# Altium PCB hexbot_bluetooth.PcbDoc
Units mm, origin at the board's own origin, x right, y up, seen from the top; angles counter-clockwise.
Board outline 79.95 x 69.34 mm, 2 copper layers (Top Layer, Bottom Layer); 32 components, 16 nets, 110 pads, 7 vias.
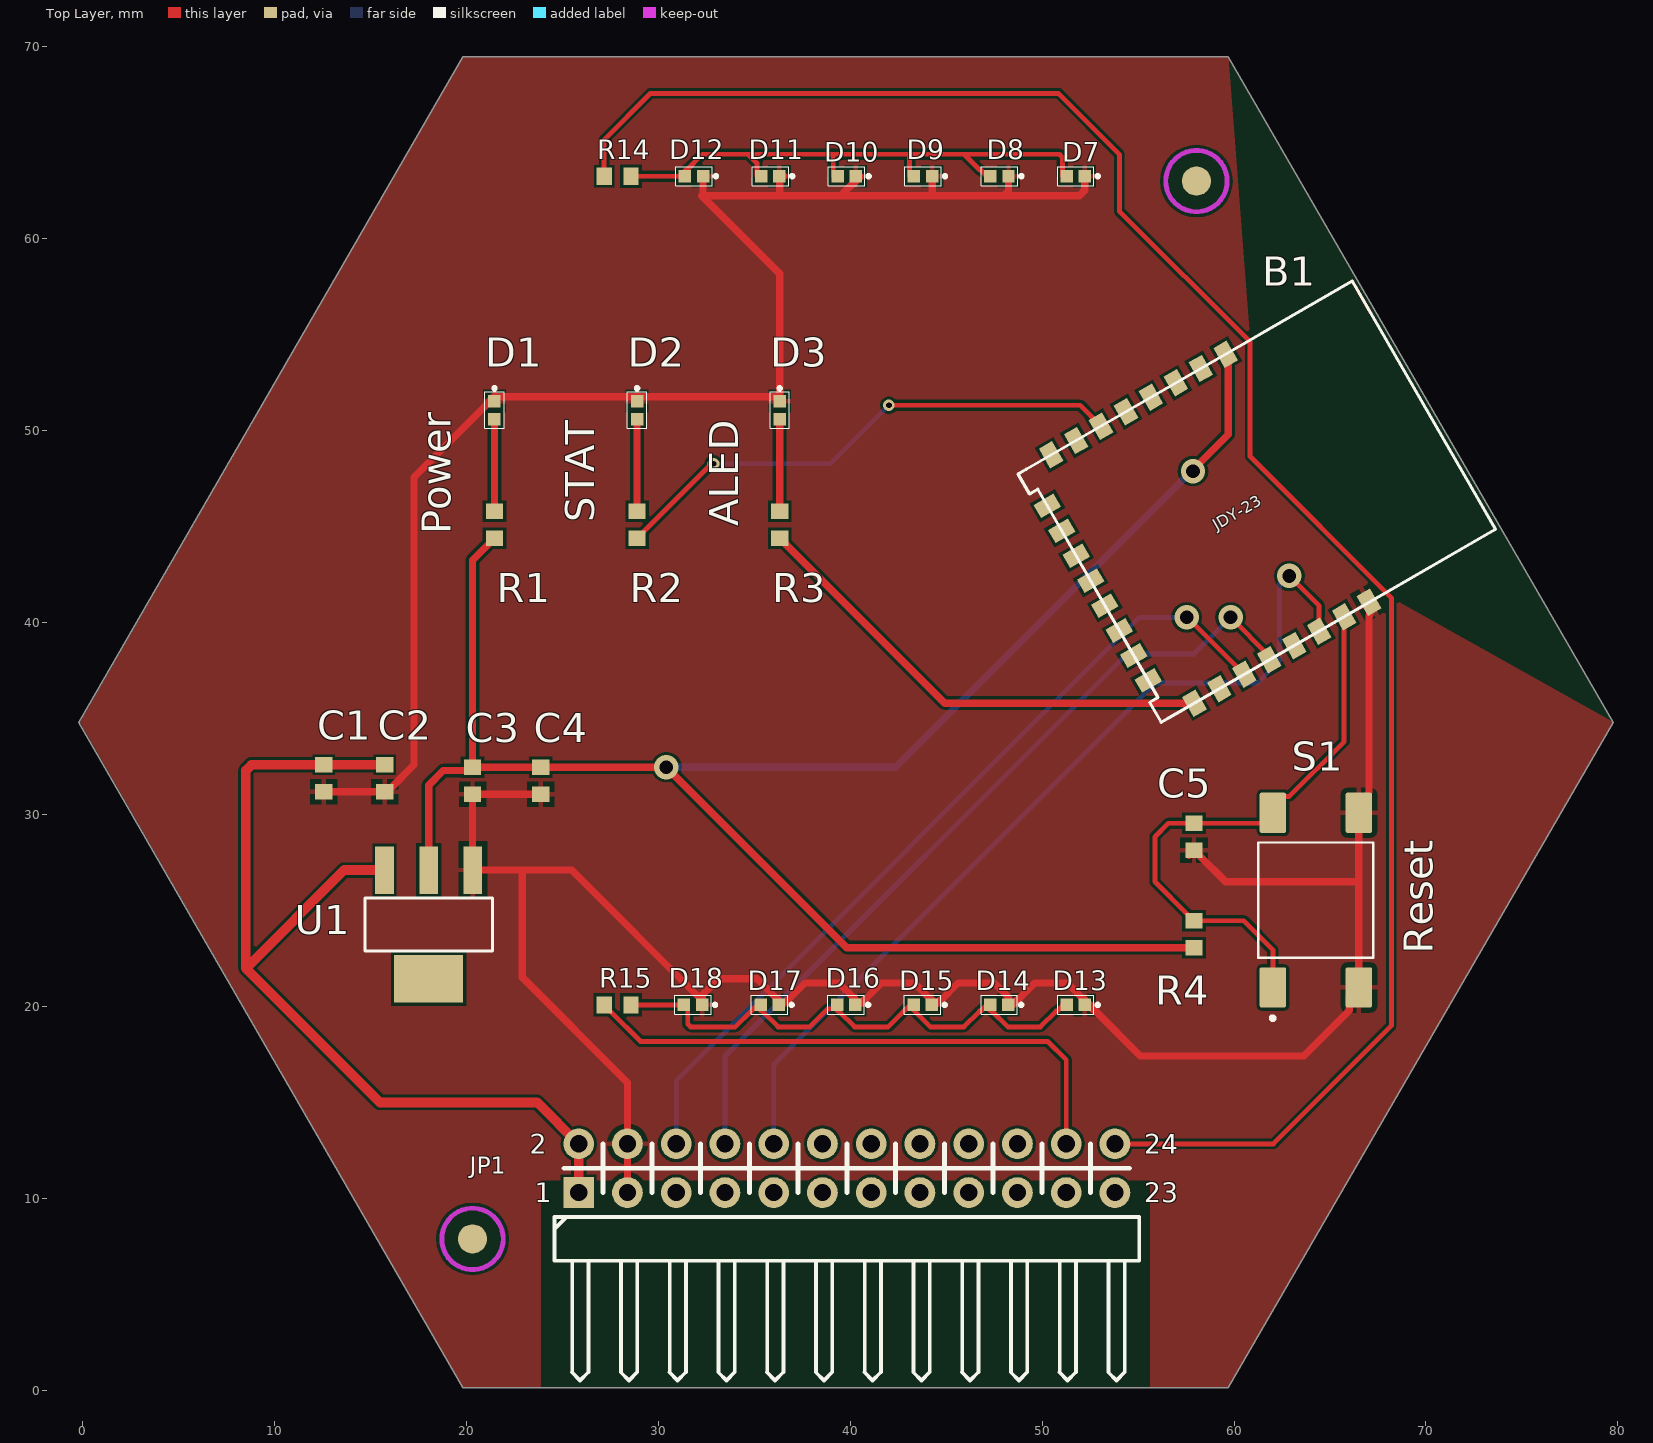
[diagram p0: Top Layer view]
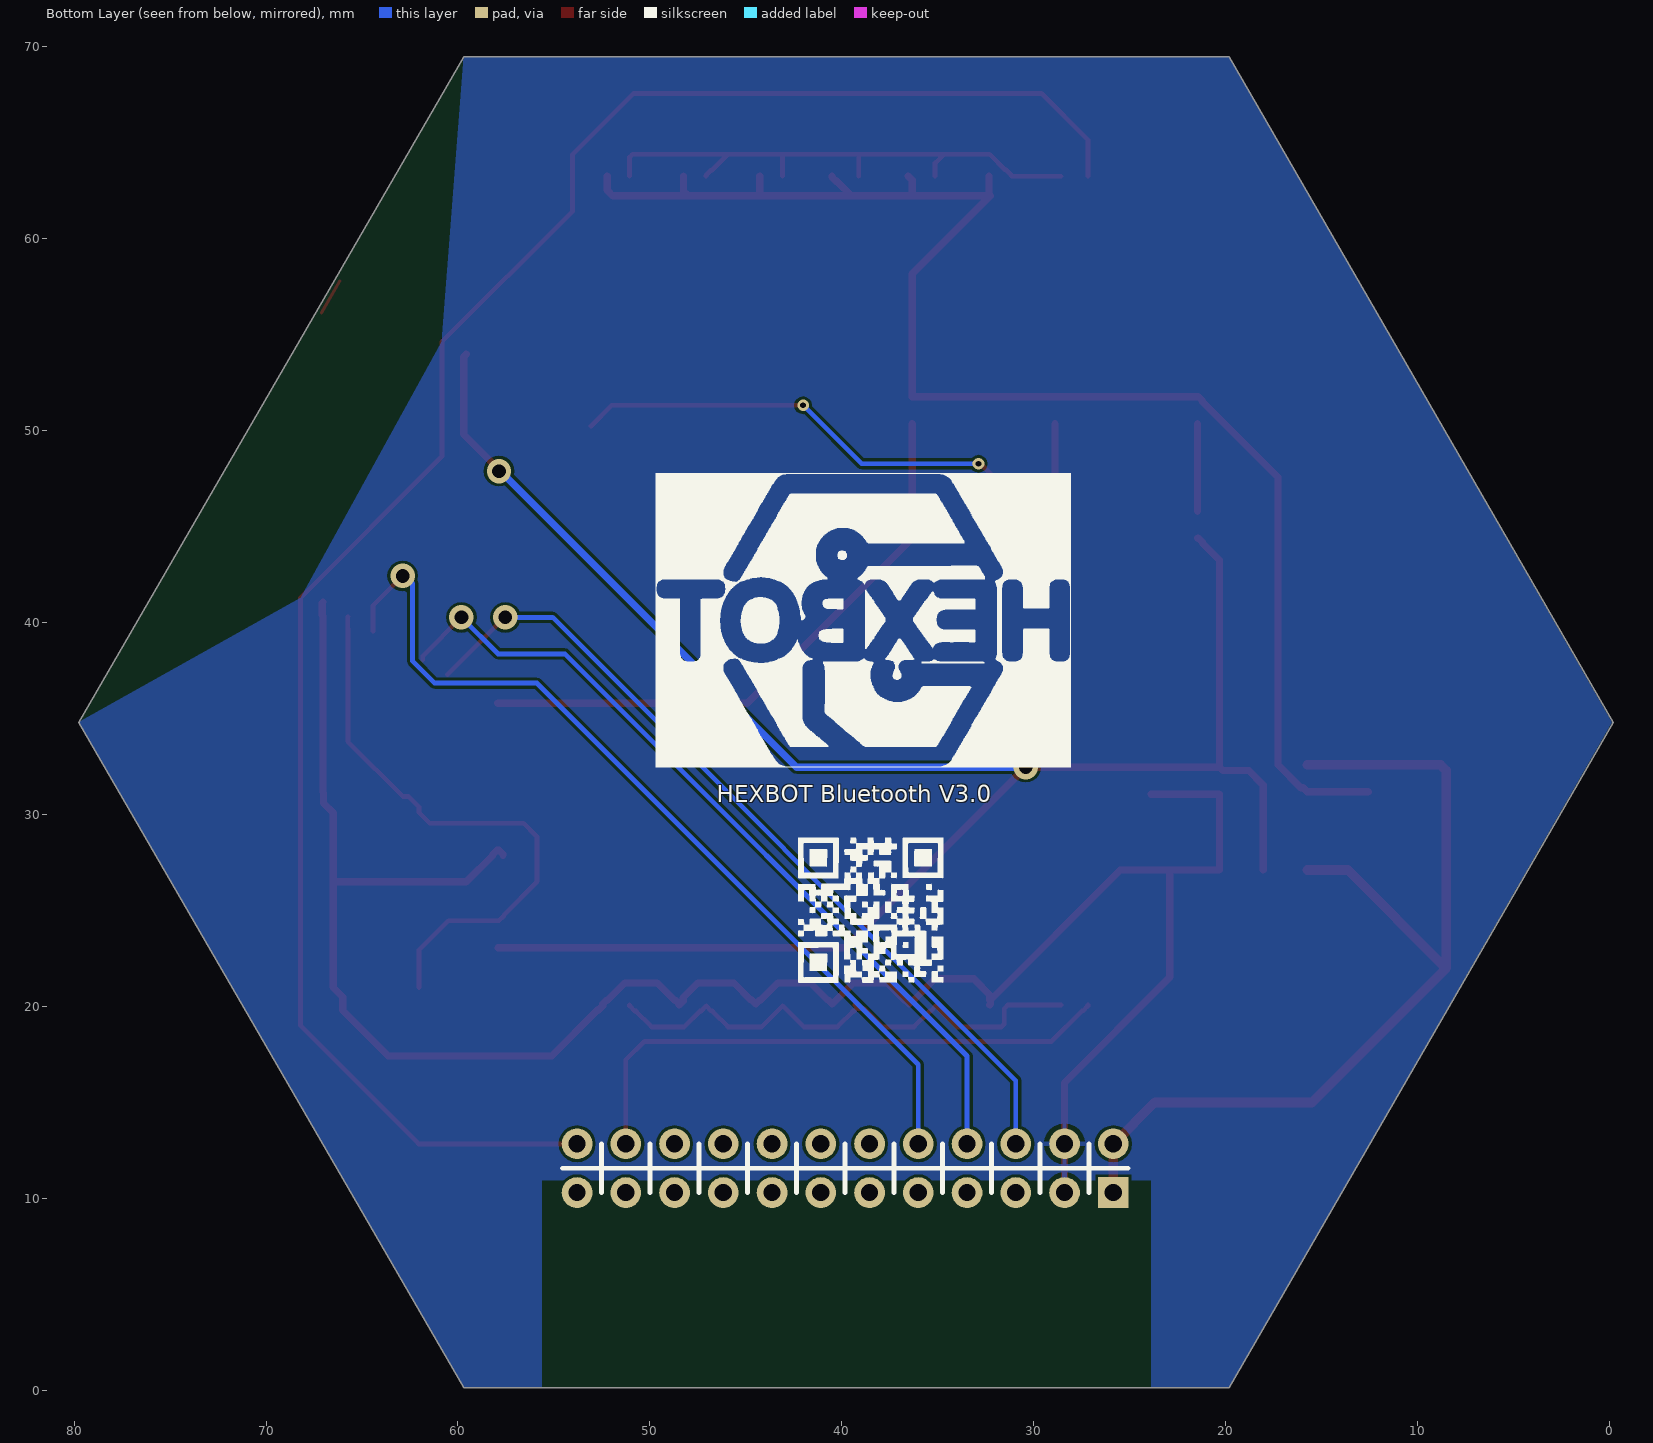
[diagram p1: Bottom Layer view, seen from below]

## Layer stack, top to bottom
Top Solder: solder mask 0.0102, Solder Resist, Dk 3.5
Top Layer: signal copper 0.0356
Dielectric 1: dielectric 0.32, FR-4, Dk 4.8
Bottom Layer: signal copper 0.0356
Bottom Solder: solder mask 0.0102, Solder Resist, Dk 3.5

## Board outline
19.812,0.127 -0.198,34.788 19.812,69.469 59.69,69.469 79.756,34.788 59.69,0.127

## Design rules (kind name [scope] priority, off if disabled: settings)
Clearance [All] p1: gap=0.152 ignorepadtopadclearanceinfootprint=TRUE
HoleToHoleClearance [All] p1: gap=0 allowstackedmicrovias=TRUE
MinimumSolderMaskSliver [All] p1: minsoldermaskwidth=0
PolygonConnect [All] p1: connectstyle=Relief reliefconductorwidth=0.254 reliefentries=4 polygonreliefangle="90 Angle" airgapwidth=0.254
RoutingVias [All] p1: holewidth=0.711 width=1.27 viastyle="Through Hole" minholewidth=0.254 minwidth=0.508 maxholewidth=0.711 maxwidth=1.27
SilkToSilkClearance [All] p1: silktosilkclearance=0
SilkToSolderMaskClearance [IsPad] p1: minsilkscreentomaskgap=0 clearancetoexposedcopper=TRUE
SolderMaskExpansion [All] p1: expansion=0.102 istentingtop=FALSE
Width Width_1 [OnLayer('Top Overlay')] p1: maxlimit=5 minlimit=0.01 preferedwidth=0.254
Width 电源 [InNetClass('电源')] p2: maxlimit=0.508 minlimit=0.381 preferedwidth=0.381
Width [InNetClass('All Nets')] p3: maxlimit=0.508 minlimit=0.254 preferedwidth=0.254
26 further rules are at their usual default settings.

## Classes and differential pairs
component class hexbot_bluetooth: B1 C1 C2 C3 C4 C5 D1 D2 D3 D7 D8 D9 D10 D11 D12 D13 D14 D15 D16 D17 D18 JP1 R1 R2 R3 R4 R14 R15 S1 U1

## Components (designator, comment, footprint, x,y, rotation, side; value= is the part's Value field where it differs from the comment)
B1 "JDY-23" BlueTooth_JDY-23 60.479,45.908 r30 top
C1 "10uF" 1608[0603] 12.573,31.877 r90 top
C2 "0.1uF" 1608[0603] 15.748,31.877 r90 top
C3 "10uF" 1608[0603] 20.32,31.75 r90 top
C4 "0.1uF" 1608[0603] 23.876,31.75 r90 top
C5 "Cap Semi" 1608[0603] 57.912,28.829 r90 top value=10u
D1 "LED2" DIOC1005X06N 21.463,51.054 r90 top
D2 "LED2" DIOC1005X06N 28.892,51.054 r90 top
D3 "LED2" DIOC1005X06N 36.322,51.054 r90 top
D7 "LED2" DIOC1005X06N 51.751,63.246 r0 top
D8 "LED2" DIOC1005X06N 47.772,63.246 r0 top
D9 "LED2" DIOC1005X06N 43.792,63.246 r0 top
D10 "LED2" DIOC1005X06N 39.813,63.246 r0 top
D11 "LED2" DIOC1005X06N 35.834,63.246 r0 top
D12 "LED2" DIOC1005X06N 31.854,63.246 r0 top
D13 "LED2" DIOC1005X06N 51.751,20.066 r0 top
D14 "LED2" DIOC1005X06N 47.763,20.066 r0 top
D15 "LED2" DIOC1005X06N 43.775,20.066 r0 top
D16 "LED2" DIOC1005X06N 39.788,20.066 r0 top
D17 "LED2" DIOC1005X06N 35.8,20.066 r0 top
D18 "LED2" DIOC1005X06N 31.812,20.066 r0 top
JP1 "Header 2X11" HDR2.54-WI-2x12P 39.822,11.557 r0 top
mark1 "Mark" Mark 20.32,7.874 r90 top
mark2 "Mark" Mark 58.039,62.992 r90 top
R1 "1K" 1608[0603] 21.463,45.085 r270 top
R2 "1K" 1608[0603] 28.892,45.085 r270 top
R3 "1K" 1608[0603] 36.322,45.085 r270 top
R4 "Res1" 1608[0603] 57.912,23.749 r270 top value=10K
R14 "51R" 1608[0603] 27.875,63.246 r180 top
R15 "51R" 1608[0603] 27.875,20.066 r180 top
S1 "4-1437565-1" TE_FSM4JSMA 64.262,25.527 r90 top
U1 "AMS1117-3.3" SOT-223-4_L6.5-W3.5-P2.30-LS7.0-BR 18.034,24.257 r90 top

## Footprints (in the part's own frame and the unit in brackets; to place one, negate y for a bottom-side part, rotate by r counter-clockwise, add the part's x,y. Pads: shape width x height; smd on the part's side, far side on the other; paste and mask are expansions set on the pad)
1608[0603] [mm] "Chip Capacitor, Body 1.6x0.8mm, IPC High Density"
  rect 0.8x0.9 smd: 1(-0.7,0) 2(0.7,0)
  body extent -0.87,-0.48 0.87,0.48, height 1.3
BlueTooth_JDY-23 [mm]
  rect 0.8x1.2 smd: 1(3.24,7.444) 2(1.74,7.444) 3(0.24,7.444) 4(-1.26,7.444) 5(-2.76,7.444) 6(-4.26,7.444) 7(-5.76,7.444) 8(-7.26,7.444) 17(-7.26,-7.491) 18(-5.76,-7.491) 19(-4.26,-7.491) 20(-2.76,-7.491) 21(-1.26,-7.491) 22(0.24,-7.491) 23(1.74,-7.491) 24(3.24,-7.491)
  rect 1.2x0.8 smd: 9(-8.76,5.242) 10(-8.76,3.742) 11(-8.76,2.242) 12(-8.76,0.742) 13(-8.76,-0.758) 14(-8.76,-2.258) 15(-8.76,-3.758) 16(-8.76,-5.258)
  Top Layer lines w0.16: 10.855,7.444 10.855,5.539
  silkscreen extent -9.26,-7.49 10.85,7.44
DIOC1005X06N [mm] "Chip Diode, 2-Leads, Body 1.00x0.50mm, IPC Medium Density"
  rect 0.65x0.65 smd: 1(-0.475,0) 2(0.475,0)
  silkscreen extent -0.95,-0.5 1.18,0.5
HDR2.54-WI-2x12P [mm] "双排弯脚排针，12x2脚  淘宝ID:黄晶宝石   店铺网址:https://shop463601444.taobao.com"
  rect 1.6x1.6 hole 0.9: 1(-13.97,-1.27)
  round 1.6 hole 0.9: 2(-13.97,1.27) 3(-11.43,-1.27) 4(-11.43,1.27) 5(-8.89,-1.27) 6(-8.89,1.27) 7(-6.35,-1.27) 8(-6.35,1.27) 9(-3.81,-1.27) 10(-3.81,1.27) 11(-1.27,-1.27) 12(-1.27,1.27) 13(1.27,-1.27) 14(1.27,1.27) 15(3.81,-1.27) 16(3.81,1.27) 17(6.35,-1.27) 18(6.35,1.27) 19(8.89,-1.27) 20(8.89,1.27) 21(11.43,-1.27) 22(11.43,1.27) 23(13.97,-1.27) 24(13.97,1.27)
  silkscreen extent -15.24,-11.06 15.24,1.27, body extent -15.24,-11.23 15.24,1.62, height 5.1
Mark [mil]
  round 60 smd mask+39.37: mark(0,0)
  Top Layer keep-out circle w10: c0,0 r62.99
SOT-223-4_L6.5-W3.5-P2.30-LS7.0-BR [mm]
  rect 2.47x0.98 smd: 1(2.835,-2.3) 2(2.835,0) 3(2.835,2.3)
  rect 2.47x3.6 smd: 4(-2.835,0)
  silkscreen extent -1.37,-3.33 1.37,3.33
TE_FSM4JSMA [mm]
  rrect15% 2.1x1.38 smd: 1(-4.55,2.24) 2(4.55,2.24) 3(-4.55,-2.24) 4(4.55,-2.24)
  silkscreen extent -6.25,-3 3,3

## Part data
B1: library part BlueTooth
C1 C2 C3 C4: library part "Cap Semi", "Capacitor (Semiconductor SIM Model)", LatestRevisionDate=29-May-2009, LatestRevisionNote="IPC-7351 Footprint Added.", PackageDescription="Chip Capacitor", PackageReference=C1206, Published=8-Jun-2000, Publisher="Altium Limited"
C5: "Capacitor (Semiconductor SIM Model)", LatestRevisionDate=29-May-2009, LatestRevisionNote="IPC-7351 Footprint Added.", PackageDescription="Chip Capacitor", PackageReference=C1206, Published=8-Jun-2000, Publisher="Altium Limited"
D1 D2 D3 D7 D8 D9 D10 D11 D12 D13 D14 D15 D16 D17 D18: "Typical RED, GREEN, YELLOW, AMBER GaAs LED", LatestRevisionDate=17-Jul-2002, LatestRevisionNote="Re-released for DXP Platform.", PackageDescription="SM LED; 2 Flat Leads", PackageReference=3.2X1.6X1.1, PackageVersion=Feb-2002, Published=8-Jun-2000, Publisher="Altium Limited"
JP1: library part "Header 12X2", "12*2P接插件", BOM名称=12*2P接插件, 学习资源=https://shop463601444.taobao.com, 版权归属="封装库来自淘宝卖家 ID：黄晶宝石"
R1 R2 R3: library part Res3, "Resistor", LatestRevisionDate=29-May-2009, LatestRevisionNote="IPC-7351 Footprint Added.", PackageDescription="Chip Resistor", PackageReference=J1-0603, Published=8-Jun-2000, Publisher="Altium Limited"
R4: "Resistor", LatestRevisionDate=17-Jul-2002, LatestRevisionNote="Re-released for DXP Platform.", PackageDescription="Axial Device, Thru-Hole; 2 Leads; 0.3 in Pin Spacing", PackageReference=AXIAL-0.3, Published=8-Jun-2000, Publisher="Altium Limited"
R14 R15: library part Res1, "Resistor", LatestRevisionDate=17-Jul-2002, LatestRevisionNote="Re-released for DXP Platform.", PackageDescription="Axial Device, Thru-Hole; 2 Leads; 0.3 in Pin Spacing", PackageReference=AXIAL-0.3, Published=8-Jun-2000, Publisher="Altium Limited"
S1: library part FSM4JSMA, "Tactile Switch SPST-NO Top Actuated Surface Mount", Contact_Current_Rating="50 mA", Package=None, Availability=Unavailable, Configuration_Pole-Throw="Single Pole - Single Throw", EU_RoHS_Compliance=Compliant, MF="TE Connectivity", MP=FSM4JSMA, Price=None, SnapEDA_Link=https://www.snapeda.com/parts/FSM4JSMA/TE%20Connectivity%20ALCOSWITCH%20Switches/view-part/543632/?ref=snap, TE_purchase_URL=https://www.te.com/usa-en/product-4-1437565-1.html?te_bu=Cor&te_type=disp&te_campaign=seda_glo_cor-seda-global-disp-prtnr-fy19-seda-model-bom-cta_sma-317_1&elqCampaignId=32493
U1: "Sot223/Pkg 1-Amp 3.3-Volt Low Drop Out Voltage Regulatator", Package=None, Availability=Unavailable, MF="Advanced Monolithic Systems", MP=AMS1117-3.3, Price=None, SnapEDA_Link=https://www.snapeda.com/parts/AMS1117-3.3/Advanced%20Monolithic%20Systems/view-part/53450/?ref=snap

## Via types
v1: diameter 1.27, hole 0.711, Top Layer to Bottom Layer, tented both sides, 5 vias
v2: diameter 0.6, hole 0.3, Top Layer to Bottom Layer, 2 vias

## Nets (pads, with @x,y where several pads share a name; then routed paths per layer and width w, separated by ;. In a path a pad name is that pad's centre, name@x,y a point inside that pad or via, vN(x,y) a via of type N, cw(c..) or ccw(c..) an arc to the next point about the centre after c; other vN are vias at no path point)
+5: C1.2 C2.2 JP1.1 JP1.2 U1.3 | length 50.7
  Top Layer w0.508: U1.3 13.63,27.092 8.509,21.971 ; C2.2 C1.2 8.807,32.577 8.509,32.279 8.509,21.971 ; JP1.1 JP1.2 23.693,14.986 15.494,14.986 8.509,21.971
ALED: B1.17 R3.2 | length 25.2
  Top Layer w0.381: R3.2 36.372,44.385 36.582,44.175 36.582,44.125 44.916,35.791 B1.17
GND: B1.24 C1.1 C2.1 C3.1 C4.1 C5.1 D1.2 D2.2 D3.2 D7.2 D8.2 D9.2 D10.2 D11.2 D12.2 D13.2 D14.2 D15.2 D16.2 D17.2 D18.2 JP1.3 JP1.4 S1.3 S1.4 U1.1 | length 199.4
  Top Layer w0.381: C1.1 C2.1 15.958,31.387 16.082,31.387 17.272,32.577 17.272,47.563 21.203,51.495 21.203,51.545 21.413,51.754 36.322,51.754 36.322,58.166 ; C4.1 C3.1 20.32,27.106 U1.1 22.91,27.092 ; JP1.3 JP1.4 28.392,16.017 22.91,21.499 22.91,27.092 ; D18.2 32.253,20.1 32.253,20.326 25.486,27.092 22.91,27.092 ; D18.2@32.287,20.326 32.287,20.586 33.123,21.422 35.144,21.422 36.24,20.326 36.29,20.326 36.5,20.116 36.709,20.326 36.759,20.326 37.643,21.209 39.395,21.209 40.488,20.116 40.697,20.326 40.747,20.326 41.631,21.209 43.338,21.209 43.561,20.986 43.561,20.98 44.216,20.326 44.266,20.326 44.475,20.116 44.685,20.326 44.735,20.326 45.618,21.209 47.498,21.209 48.254,20.453 48.254,20.276 48.463,20.066 48.463,20.116 48.673,20.326 48.723,20.326 49.606,21.209 51.308,21.209 52.192,20.326 52.242,20.326 52.451,20.116 52.451,20.016 52.661,19.806 52.711,19.806 55.118,17.399 63.627,17.399 66.003,19.775 66.003,20.477 S1.3 66.502,26.481 ; D12.2 32.329,62.159 36.322,58.166 ; 36.322,62.23 36.324,62.232 36.324,63.036 D11.2@36.534,63.246 ; D10.2@40.513,63.246 40.513,63.196 40.304,62.986 40.254,62.986 39.497,62.23 ; 44.196,62.23 44.267,62.301 D9.2 ; D8.2 48.247,62.471 48.006,62.23 ; D7.2 52.226,62.513 51.943,62.23 48.006,62.23 ; C5.1@57.652,27.87 57.652,27.92 57.862,28.129 C5.1 57.962,28.129 58.172,27.92 58.172,27.87 59.56,26.481 66.502,26.481 ; B1.24 67.063,41.008 67.063,40.377 67.031,40.344 67.031,31.16 67.002,31.131 67.002,30.577 S1.4 66.502,26.481 ; 36.322,58.166 32.258,62.23 39.497,62.23 ; 39.497,62.23 48.006,62.23
LED1: JP1.24 R14.2 | length 99.6
  Top Layer w0.254: R14.2 27.175,65.148 29.591,67.564 50.847,67.564 54.022,64.389 54.022,61.421 60.833,54.61 60.833,48.639 68.199,41.273 68.199,18.981 62.045,12.827 JP1.24@53.485,12.827
LED2: JP1.22 R15.2 | length 29.4
  Top Layer w0.254: R15.2 27.175,20.016 27.448,19.743 27.498,19.743 29.08,18.161 50.292,18.161 51.252,17.201 JP1.22@51.252,13.049
NetD1_1: D1.1 R1.1 | length 4.6
  Top Layer w0.381: R1.1 D1.1@21.463,50.354
NetD2_1: D2.1 R2.1 | length 4.6
  Top Layer w0.381: R2.1 D2.1@28.892,50.354
NetD3_1: D3.1 R3.1 | length 4.6
  Top Layer w0.381: R3.1 D3.1@36.322,50.354
NetD7_1: D7.1 D8.1 D9.1 D10.1 D11.1 D12.1 R14.1 | length 29.3
  Top Layer w0.254: R14.1 31.154,63.246 31.154,63.296 31.427,63.569 31.477,63.569 32.297,64.389 34.671,64.389 ; D11.1@35.134,63.246 35.134,63.926 34.671,64.389 ; D10.1@39.113,63.246 39.113,64.389 ; 43.053,64.389 43.092,64.35 D9.1@43.092,63.246 ; D8.1@47.072,63.246 47.072,63.296 46.799,63.569 46.749,63.569 45.929,64.389 ; D7.1@51.051,63.246 51.051,64.24 50.902,64.389 45.929,64.389 ; 34.671,64.389 39.113,64.389 ; 39.113,64.389 43.092,64.389 45.929,64.389
NetD13_1: D13.1 D14.1 D15.1 D16.1 D17.1 D18.1 R15.1 | length 27.7
  Top Layer w0.254: R15.1 D18.1 31.535,19.868 31.535,19.072 31.684,18.923 34.007,18.923 34.827,19.743 35.1,20.016 35.373,19.743 35.423,19.743 36.243,18.923 37.892,18.923 38.837,19.868 39.115,19.868 39.157,19.91 D16.1@39.157,19.947 ; D16.1 39.276,20.066 D16.1@39.157,19.947 ; D13.1@51.051,20.066 51.051,20.016 50.778,19.743 50.728,19.743 49.908,18.923 48.206,18.923 47.386,19.743 47.336,19.743 47.063,20.016 46.79,19.743 46.74,19.743 45.92,18.923 44.168,18.923 43.075,20.016 41.982,18.923 40.231,18.923 39.411,19.743 39.361,19.743 D16.1@39.157,19.947
PWRC: B1.22 JP1.10 | length 47.5
  Top Layer w0.254: v1(62.877,42.418) 64.433,40.863 64.433,40.282 64.426,40.276 64.426,39.547 B1.22
  Bottom Layer w0.254: JP1.10 36.012,16.962 55.88,36.83 61.214,36.83 62.357,37.973 62.357,42.037 62.738,42.418 v1(62.877,42.418)
RESET: B1.23 C5.2 R4.1 S1.1 S1.2 | length 30.5
  Top Layer w0.254: S1.1 62.022,22.929 60.502,24.449 R4.1 57.862,24.449 57.589,24.722 57.589,24.772 55.88,26.481 55.88,28.829 56.58,29.529 C5.2 61.474,29.529 S1.2 62.022,30.369 62.585,30.932 62.877,30.932 65.732,33.787 65.732,39.692 65.738,39.698 65.738,40.285 B1.23
RXD: B1.20 JP1.8 | length 43.4
  Top Layer w0.254: v1(59.817,40.259) 61.834,38.242 B1.20
  Bottom Layer w0.254: JP1.8 33.472,17.402 54.424,38.354 57.912,38.354 v1(59.817,40.259)
STAT: B1.6 R2.2 | length 27.5
  Top Layer w0.254: R2.2 28.942,44.385 29.216,44.658 29.216,44.708 v2@32.821,48.314 ; v2@42.019,51.308 51.985,51.308 B1.6
  Bottom Layer w0.254: v2(32.875,48.26) 38.967,48.26 v2(42.015,51.308)
TXD: B1.19 JP1.6 | length 44.1
  Top Layer w0.254: v1(57.531,40.259) 57.567,40.259 B1.19
  Bottom Layer w0.254: JP1.6 30.932,16.123 55.068,40.259 v1(57.531,40.259)
VCC3V3: B1.1 C3.2 C4.2 R1.2 R4.2 U1.2 | length 101.8
  Top Layer w0.381: U1.2 18.034,31.517 18.796,32.279 20.149,32.279 C3.2 ; R1.2 21.413,44.385 21.203,44.175 21.203,44.125 20.32,43.242 C3.2 ; v1(57.862,47.879) 57.862,47.956 59.693,49.787 59.693,53.845 B1.1 ; R4.2 39.822,23.049 v1(30.421,32.45) C4.2 C3.2
  Bottom Layer w0.381: v1(30.421,32.45) 42.356,32.45 57.785,47.879 v1(57.862,47.879)
pads on no net: B1.2 B1.3 B1.4 B1.5 B1.7 B1.8 B1.9 B1.10 B1.11 B1.12 B1.13 B1.14 B1.15 B1.16 B1.18 B1.21 JP1.5 JP1.7 JP1.9 JP1.11 JP1.12 JP1.13 JP1.14 JP1.15 JP1.16 JP1.17 JP1.18 JP1.19 JP1.20 JP1.21 JP1.23 mark1.mark mark2.mark U1.4

## Polygon pours and split planes (outlines as drawn)
GND on Bottom Layer "GND_L02_P003" (solid, remove dead copper, pour order 3): 59.69,69.469 60.833,54.61 68.199,41.275 79.756,34.798 59.69,0.127 55.626,0.127 55.626,10.922 23.876,10.922 23.876,0.127 19.812,0.127 -0.127,34.798 19.812,69.469
GND on Top Layer "GND_L01_P001" (solid, remove dead copper, pour order 1): 79.756,34.798 68.199,41.273 60.833,54.61 59.693,69.469 19.812,69.469 -0.127,34.798 19.812,0.127 23.876,0.127 23.876,10.922 55.626,10.922 55.626,0.127 59.69,0.127

## Silkscreen, mask and mechanical layers (free items; w line width, h text height)
Top Overlay:
  text "STAT" at 26.67,45.212 h1.52 r90
  text "ALED" at 34.163,45.015 h1.52 r90
  text "Power" at 19.177,44.577 h1.52 r90
  text "Reset" at 70.358,22.733 h1.52 r90
Bottom Overlay:
  drawing of 3021 lines, arcs and shapes, not listed
  text "HEXBOT Bluetooth V3.0" at 46.522,30.344 h1.5
Mechanical 1:
  lines w0.254: -0.198,34.788 19.812,69.469 59.69,69.469 79.756,34.788 59.69,0.127 55.626,0.127 23.876,0.127 19.812,0.127 -0.198,34.788

## Text inside footprints (layer, text, board x,y; h text height)
JP1: Top Overlay "1" at 23.566,9.779 h1.02; Top Overlay "2" at 23.312,12.319 h1.02; Top Overlay "23" at 55.316,9.779 h1.02; Top Overlay "24" at 55.316,12.319 h1.02